# EAGLE board Circuit (EAGLE 9.7.0)

Size 234.14 x 274.78 mm. Coordinates in mm from the lower left corner, seen from the top.
Outline: 0,0 234.14,0 234.14,274.78 0,274.78 0,0
Copper layers (1*16): Top 0.035mm / dielectric 1.5mm / Bottom 0.035mm
Design rules "default": minimum track width 6mil, minimum drill 0.35mm, track to track 6mil, track to pad 6mil, pad to pad 6mil, via to via 6mil, smd to smd 6mil, copper to edge 40mil, drill to drill 6mil, minimum pad ring 10mil, minimum via ring 8mil, stop-mask expansion 4mil, vias tented up to drill 0mil, thermal gap 10mil

## Footprints (pad centres in the part's own frame; a part is rotated, then mirrored left to right if it is on the bottom)
PIEZO = drill 1 pad 1.6: 1 -3.5,0; 2 3.5,0
28027 = drill 1.016 long: 1 -2.54,0; 2 0,0; 3 2.54,0
RESAD1016W63L850D250B = drill 0.83 pad 1.43: 1 -5.08,0; 2 5.08,0
SWITCH-MOMENTARY-PTH-6.5MM = drill 1.016 pad 1.88: 1 -3.251,2.261; 2 3.251,2.261; 3 -3.251,-2.261; 4 3.251,-2.261
ARDUINO-UNO-R3-SHIELD = drill 1.016 pad 1.88: 3.3V 24.13,-2.54; 5V 24.13,0; A0 24.13,12.7; A1 24.13,15.24; A2 24.13,17.78; A3 24.13,20.32; A4 24.13,22.86; A5 24.13,25.4; AREF -24.13,-13.97; D2 -24.13,20.32; D3 -24.13,17.78; D4 -24.13,15.24; D5 -24.13,12.7; D6 -24.13,10.16; D7 -24.13,7.62; D8 -24.13,3.81; D9 -24.13,1.27; D10 -24.13,-1.27; D11 -24.13,-3.81; D12 -24.13,-6.35; D13 -24.13,-8.89; GND@0 24.13,2.54; GND@1 24.13,5.08; GND@2 -24.13,-11.43; IOREF 24.13,-7.62; NC 24.13,-10.16; RES 24.13,-5.08; RX -24.13,25.4; SCL -24.13,-19.05; SDA -24.13,-16.51; TX -24.13,22.86; VIN 24.13,7.62
JHD-162A = drill 1.016 long: 1 -19.05,0; 2 -16.51,0; 3 -13.97,0; 4 -11.43,0; 5 -8.89,0; 6 -6.35,0; 7 -3.81,0; 8 -1.27,0; 9 1.27,0; 10 3.81,0; 11 6.35,0; 12 8.89,0; 13 11.43,0; 14 13.97,0; 15 16.51,0; 16 19.05,0

## Placement (x,y rotation side)
PIEZO1  PIEZO  [PIEZO]  95.01,121.46 180 top
PIR2  PIR-SENSOR_28027  [28027]  204.22,268.43 0 top
PIR3  PIR-SENSOR_28027  [28027]  20.95,6.68 180 top
PIR4  PIR-SENSOR_28027  [28027]  213.19,6.35 180 top
R1  1k  [RESAD1016W63L850D250B]  89.77,81.86 0 top
R2  1k  [RESAD1016W63L850D250B]  88.8,69.95 0 top
R3  1k  [RESAD1016W63L850D250B]  89.19,56.79 0 top
R4  1k  [RESAD1016W63L850D250B]  167.6,91.97 0 top
S1  SWITCH_MOMENTARY  [SWITCH-MOMENTARY-PTH-6.5MM]  96.81,60.6 90 top
S2  SWITCH_MOMENTARY  [SWITCH-MOMENTARY-PTH-6.5MM]  97.39,85.67 90 top
S3  SWITCH_MOMENTARY  [SWITCH-MOMENTARY-PTH-6.5MM]  96.42,73.76 90 top
U1  ARDUINO-UNO-R3-SHIELD  [ARDUINO-UNO-R3-SHIELD]  76.56,166.39 270 top
U4  LCD-16X2JHD-162A  [JHD-162A]  131.22,86.39 0 top

## Library data of the parts
PIEZO1 PIR2-PIR4 R1-R4 S1-S3 U1 U4 = Tinkercad

## Nets
U1_5V: PIR2.2 PIR3.2 PIR4.2 R1.1 R2.1 R3.1 U1.5V U4.2 U4.15
U1_A0: PIEZO1.1 U1.A0
U1_D2: U1.D2 U4.11
U1_D3: U1.D3 U4.12
U1_D4: U1.D4 U4.13
U1_D5: U1.D5 U4.14
U1_D6: U1.D6 U4.6
U1_D7: U1.D7 U4.4
U1_D8: PIR2.1 U1.D8
U1_D9: PIR3.1 U1.D9
U1_D10: PIR4.1 U1.D10
U1_D11: R3.2 S1.1 S1.2 U1.D11
U1_D12: R2.2 S3.1 S3.2 U1.D12
U1_D13: R1.2 S2.1 S2.2 U1.D13
U1_GND: PIEZO1.2 PIR2.3 PIR3.3 PIR4.3 R4.2 S1.3 S2.3 S3.3 U1.GND@0 U1.GND@1 U1.GND@2 U4.1 U4.3 U4.5
U4_LED-: R4.1 U4.16

## Tracks (layer width: path | path; a pad name or v marks a point on that pad's centre or on a via)
U1_5V  (8 unrouted)
U1_A0  (1 unrouted)
U1_D2  (1 unrouted)
U1_D3  (1 unrouted)
U1_D4  (1 unrouted)
U1_D5  (1 unrouted)
U1_D6  (1 unrouted)
U1_D7  (1 unrouted)
U1_D8  (1 unrouted)
U1_D9  (1 unrouted)
U1_D10  (1 unrouted)
U1_D11  (3 unrouted)
U1_D12  (3 unrouted)
U1_D13  (3 unrouted)
U1_GND  (13 unrouted)
U4_LED-  (1 unrouted)